# EAGLE board PIC18F14K50 USB (EAGLE 6.4)
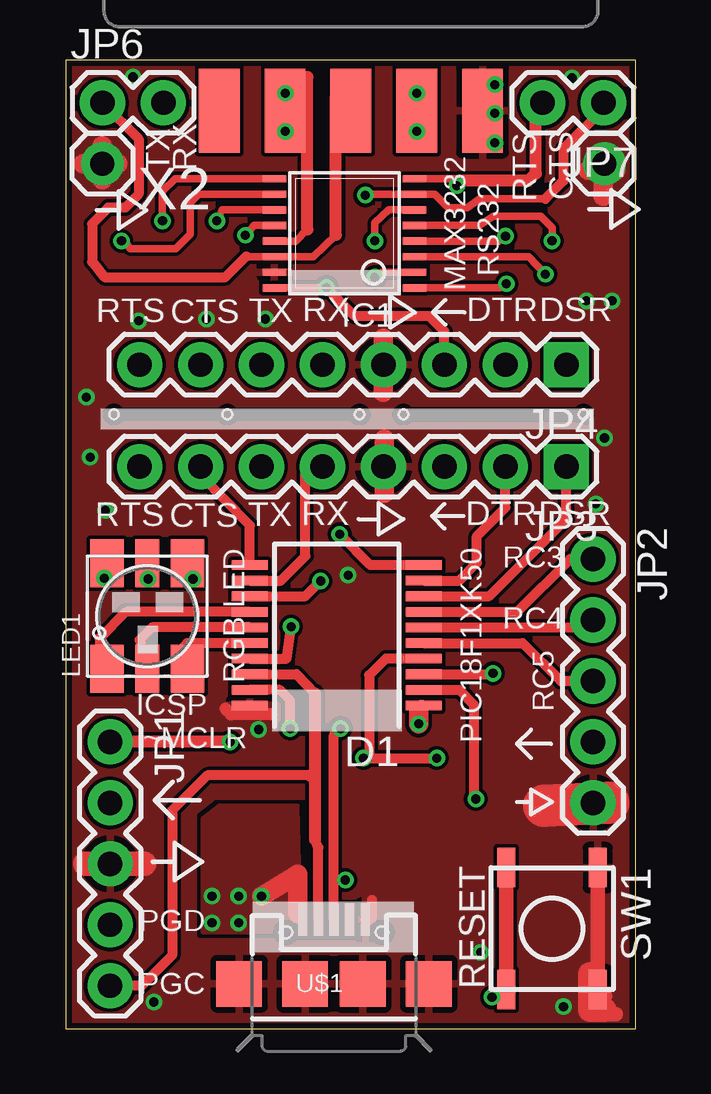
[diagram p0: board, top side]
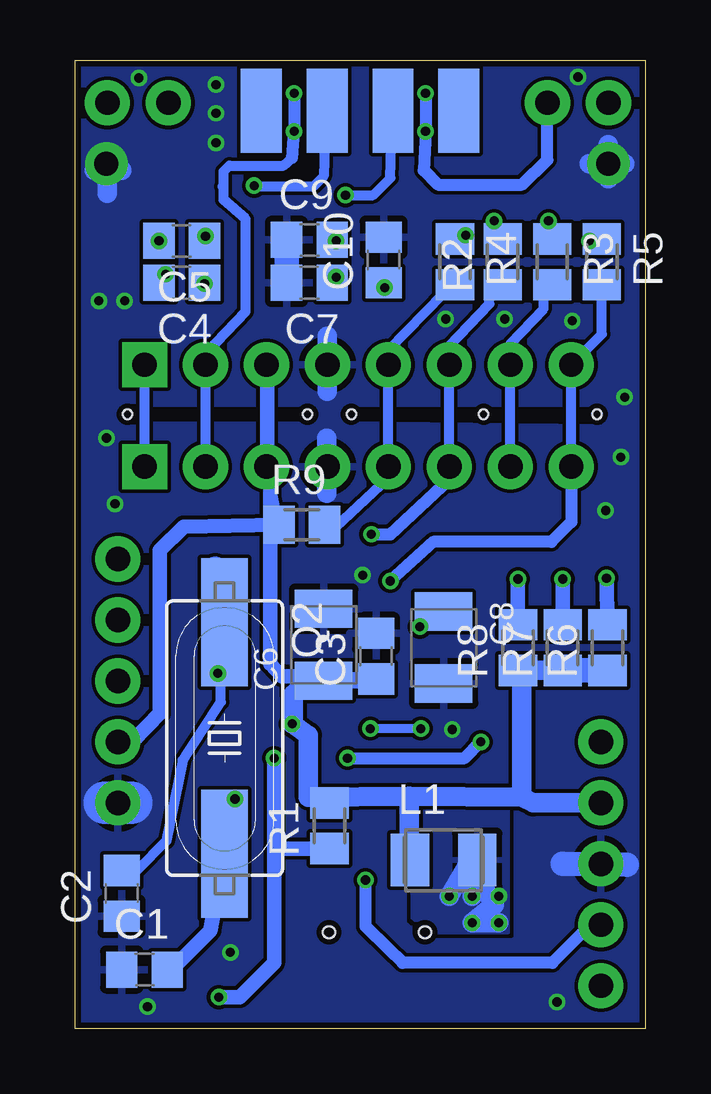
[diagram p1: board, bottom side, seen from below]

Size 23.75 x 40.36 mm. Coordinates in mm from the lower left corner, seen from the top.
Outline: 23.75,0 23.75,40.36 0,40.36 0,0 23.75,0
Copper layers (1*16): Top 0.035mm / dielectric 1.5mm / Bottom 0.035mm
Design rules "Fusion_eagle_rule_v1.1": minimum track width 6mil, minimum drill 12mil, track to track 6mil, track to pad 6mil, pad to pad 6mil, via to via 6mil, smd to smd 0mil, copper to edge 10mil, drill to drill 10mil, minimum pad ring 10mil, minimum via ring 6mil, stop-mask expansion 2mil, vias tented up to drill 100mil, thermal gap 10mil
Holes 0.38 mm at 21.57,25.6 2,25.6 14.07,25.6 12.24,25.6 6.72,25.6

## Footprints (pad centres in the part's own frame; a part is rotated, then mirrored left to right if it is on the bottom)
C0805 = smd 1.3 x 1.5: 1 -0.95,0; 2 0.95,0
SMC_B = smd 1.6 x 2.4: + -1.5,0; - 1.5,0
SSOP20 = smd 0.4 x 1.5: 1 -2.925,-3.625; 2 -2.275,-3.625; 3 -1.625,-3.625; 4 -0.975,-3.625; 5 -0.325,-3.625; 6 0.325,-3.625; 7 0.975,-3.625; 8 1.625,-3.625; 9 2.275,-3.625; 10 2.925,-3.625; 11 2.925,3.625; 12 2.275,3.625; 13 1.625,3.625; 14 0.975,3.625; 15 0.325,3.625; 16 -0.325,3.625; 17 -0.975,3.625; 18 -1.625,3.625; 19 -2.275,3.625; 20 -2.925,3.625
TSSOP16 = smd 0.305 x 0.991: 1 -2.275,-2.918; 2 -1.625,-2.918; 3 -0.975,-2.918; 4 -0.325,-2.918; 5 0.325,-2.918; 6 0.975,-2.918; 7 1.625,-2.918; 8 2.275,-2.918; 9 2.275,2.918; 10 1.625,2.918; 11 0.975,2.918; 12 0.325,2.918; 13 -0.325,2.918; 14 -0.975,2.918; 15 -1.625,2.918; 16 -2.275,2.918
1X05 = drill 1.016 pad 1.88: 1 0,0; 2 2.54,0; 3 5.08,0; 4 7.62,0; 5 10.16,0
1X08 = drill 1.016 pad 1.88 square: 1 0,0 | drill 1.016 pad 1.88: 2 2.54,0; 3 5.08,0; 4 7.62,0; 5 10.16,0; 6 12.7,0; 7 15.24,0; 8 17.78,0
1X02 = drill 1.016 pad 1.88: 1 0,0; 2 2.54,0
L3225M = smd 1.6 x 2.2: 1 -1.4,0; 2 1.4,0
LED-TRICOLOR-5050 = smd 2 x 1.4: 1 -2.2,1.681; 3 -2.2,-1.681; 4 2.2,-1.681; 6 2.2,1.681 | smd 2 x 1: 2 -2.2,0; 5 2.2,0
HC49UP = smd 5.334 x 1.93: 1 -4.826,0; 2 4.826,0
M0805 = smd 1.3 x 1.6: 1 -0.95,0; 2 0.95,0
TACT_SWITCH_SMALL = smd 1.651 x 0.762: 1 -2.54,1.905; 2 2.54,1.905; 3 -2.54,-1.905; 4 2.54,-1.905
USB-MICROB-HW-MC-5F-01 = smd 0.4 x 1.35: D+ 0,2.675; D- -0.65,2.675; ID 0.65,2.675 | smd 0.38 x 1.35: GND 1.3,2.675; VBUS -1.3,2.675 | smd 1.9 x 1.9: MT1 -3.95,0; MT2 3.95,0; MT3 1.2,0; MT4 -1.2,0 | hole 0.5: -2,2.15; 2,2.15
F09D = smd 1.7 x 3.5: 1 -5.486,-6.045; 2 -2.743,-6.045; 3 0,-6.045; 4 2.743,-6.045; 5 5.486,-6.045 | smd 1.7 x 3.5 bottom: 6 -4.115,-6.045; 7 -1.372,-6.045; 8 1.372,-6.045; 9 4.115,-6.045

## Placement (x,y rotation side)
C1  [C0805]  20.85,2.46 0 bottom
C2  [C0805]  21.81,5.64 90 bottom
C3  [C0805]  11.21,15.52 90 bottom
C4  [C0805]  19.3,31.08 180 bottom
C5  [C0805]  19.3,32.82 180 bottom
C6  [SMC_B]  13.39,15.99 90 bottom
C7  [C0805]  13.99,31.08 180 bottom
C8  [SMC_B]  8.39,15.88 270 bottom
C9  [C0805]  13.99,32.86 0 bottom
C10  [C0805]  10.89,32.03 90 bottom
D1  PIC18F14K50D  [SSOP20]  11.29,16.39 90 top
IC1  MAX3232EUE  [TSSOP16]  11.61,33.14 90 top
JP1  [1X05]  1.84,11.95 270 top
JP2  [1X05]  21.96,19.57 270 top
JP3  [1X08]  20.85,23.42 180 top
JP4  [1X08]  20.85,27.66 180 top
JP6  [1X02]  1.52,38.58 0 top
JP7  [1X02]  22.4,38.58 180 top
L1  [L3225M]  8.39,7.02 0 bottom
LED1  LED-TRICOLOR-5050  [LED-TRICOLOR-5050]  3.39,17.18 90 top
Q2  [HC49UP]  17.52,12.1 270 bottom
R1  [M0805]  13.15,8.45 90 bottom
R2  [M0805]  5.93,31.95 90 bottom
R3  [M0805]  3.87,31.95 270 bottom
R4  [M0805]  7.91,31.95 270 bottom
R5  [M0805]  1.8,31.95 270 bottom
R6  [M0805]  1.56,15.88 90 bottom
R7  [M0805]  3.43,15.88 90 bottom
R8  [M0805]  5.3,15.88 90 bottom
R9  [M0805]  14.3,20.99 0 bottom
SW1  [TACT_SWITCH_SMALL]  20.26,4.17 270 top
U$1  USB-MICROB-HW-MC-5F  [USB-MICROB-HW-MC-5F-01]  11.17,1.87 0 top
X2  [F09D]  11.88,44.29 0 top

## Library data of the parts
C1-C5 C7 C9 C10 L1 R1-R9 = rcl
C6 C8 SW1 = dp_devices
D1 = pic18f14k50
IC1 = maxim; MF: MAXIM; MPN: MAX3232EUE+; OC_FARNELL: 1379769; OC_NEWARK: 68K4632
JP1-JP4 JP6 JP7 LED1 U$1 = SparkFun
Q2 = crystal; OC_FARNELL: unknown; OC_NEWARK: unknown
X2 = con-subd; OC_FARNELL: unknown; OC_NEWARK: unknown

## Nets
5V: C3.1 C6.+ C10.1 D1.1 IC1.16 JP1.2 JP2.4 JP3.3 JP4.3 L1.1 R1.2 R6.1 R7.1 R8.1 R9.1
CTS: IC1.9 R3.1
CTS9: IC1.8 JP7.2 X2.8
CTS_M: D1.11 JP3.7 JP4.7 R3.2
D+: D1.19 JP1.4 U$1.D+
D-: D1.18 JP1.5 U$1.D-
DSR: D1.8 JP3.1 JP4.1
DTR: D1.9 JP3.2 JP4.2 X2.4
GND: C1.1 C2.1 C3.2 C6.- C7.2 C8.- C9.1 C10.2 D1.20 IC1.15 JP1.3 JP2.5 JP3.4 JP4.4 SW1.1 SW1.2 U$1.GND U$1.MT1 U$1.MT2 U$1.MT3 U$1.MT4 X2.5
LED1: D1.16 LED1.3
LED2: D1.15 LED1.2
LED3: D1.14 LED1.1
N$1: C2.2 D1.3 Q2.1
N$2: C1.2 D1.2 Q2.2
N$3: D1.5 JP2.3
N$4: D1.6 JP2.2
N$5: D1.7 JP2.1
N$13: LED1.6 R6.2
N$18: LED1.5 R7.2
N$19: LED1.4 R8.2
N$20: C4.1 IC1.1
N$21: C4.2 IC1.3
N$22: C5.1 IC1.4
N$23: C5.2 IC1.5
N$24: C7.1 IC1.2
N$25: C9.2 IC1.6
N$55: C8.+ D1.17
RTS: IC1.10 R5.1
RTS9: IC1.7 JP7.1 X2.7
RTS_M: D1.13 JP3.8 JP4.8 R5.2
RX: IC1.12 R4.1
RX9: IC1.13 JP6.2 X2.2
RX_M: D1.12 JP3.5 JP4.5 R4.2 R9.2
TX: IC1.11 R2.2
TX9: IC1.14 JP6.1 X2.3
TX_M: D1.10 JP3.6 JP4.6 R2.1
VBUS5V: L1.2 U$1.VBUS
~MCLR: D1.4 JP1.1 R1.1 SW1.3 SW1.4

## Tracks (layer width: path | path; a pad name or v marks a point on that pad's centre or on a via)
5V  (via drill 0.38)
  Top 0.305: IC1.16 8.84,30.86 v10.85,30.88
  Top 0.406: 14.71,13.46 D1.1 14.7,13.25 | JP4.3 15.77,29.05 15.14,29.69 12.04,29.69 v10.85,30.88
  Top 0.813: v14.7,12.7 14.7,13.25
  Bottom 0.305: v10.85,30.88 10.49,30.88
  Bottom 0.406: JP3.3 15.73,23.45 15.73,23.38 15.61,23.38 | R9.1 15.65,22.94 15.61,22.9 | 15.73,27.62 JP4.3
  Bottom 0.5: C10.1 10.97,31 v10.85,30.88 | R1.2 14.03,9.64
  Bottom 0.61: 15.61,23.54 15.61,23.38 15.61,22.9 15.61,15.2 15.14,14.68 14.66,14.68 14.28,14.31 | R9.1 19.23,20.91 20.22,19.92 20.22,13.14 21.33,11.99 22.2,11.99 JP2.4 | 15.73,23.45 15.73,27.62
  Bottom 0.7: C6.+ 12.87,14.53 11.61,14.53 C3.1
  Bottom 0.813: JP1.2 4.66,9.41 5.14,9.64 | 5.14,9.64 9.82,9.68 | 9.82,9.68 9.82,8.27 L1.1 | 9.82,9.68 14.03,9.64 14.03,12.22 v14.7,12.7 14.66,12.74 14.66,13.93 14.28,14.31 14.18,14.41 C6.+ | R7.1 R8.1 5.02,14.92 5.14,14.8 5.14,9.64
  Bottom 1.016: R6.1 R7.1
CTS  (via drill 0.38)
  Top 0.305: IC1.9 4.55,35.41 4.02,34.88 v4.02,33.66
  Bottom 0.5: v4.02,33.66 3.59,32.94 R3.1
CTS9  (via drill 0.38)
  Top 0.305: IC1.8 16.35,35.41 v16.29,35.12
  Top 0.5: v16.29,35.12 16.37,35.32 19.26,35.32 19.58,35.64 19.58,37.98 JP7.2
  Bottom 0.305: 13.31,38.18 X2.8 | 16.21,35.16 v16.29,35.12
  Bottom 0.406: 13.31,38.18 13.39,35.52 13.83,35.08 16.21,35.08 v16.29,35.12
CTS_M
  Top 0.406: D1.11 7.66,20.97 5.61,23.06 JP3.7
  Bottom 0.406: JP3.7 JP4.7 5.61,28.54 4.22,30 4.22,30.64 R3.2
D+  (via drill 0.38)
  Top 0.406: v9.34,12.5 9.34,13.69 8.92,14.12 D1.19 | 11.17,6.27 11.17,12.22 v11.45,12.5 | U$1.D+ 11.17,6.27 | 11.17,6.27 v11.64,6.19
  Bottom 0.381: v9.34,12.5 v11.45,12.5
  Bottom 0.5: JP1.4 2.28,4.33 3.87,2.74 10.1,2.74 10.69,3.33 11.64,4.25 v11.64,6.19
D-
  Top 0.406: D1.18 9.62,14.77 10.37,13.97 | U$1.D- 10.52,7.55 10.37,7.89 | 10.18,10.56 5.89,10.56 4.42,9.09 4.42,3.06 3.15,1.79 JP1.5
  Top 0.5: 10.37,13.97 10.37,10.36 | 10.37,10.36 10.37,7.89 | 10.18,10.56 10.37,10.36
DSR
  Top 0.406: D1.8 17.64,18.02 20.85,21.23 JP3.1
  Bottom 0.406: JP3.1 JP4.1
DTR  (via drill 0.38)
  Top 0.406: D1.9 16.38,18.67 17.12,19.41 17.12,20.52 18.31,21.71 JP3.2 | v14.62,37.39 14.66,38.17 X2.4
  Bottom 0.406: 17.56,35.12 17.56,34.53 16.65,33.73 16.65,29.89 18.31,28.14 JP4.2 JP3.2 | 17.56,35.12 17.56,35.72 17.32,35.96 15.06,35.96 14.7,36.27 | 17.6,35.08 17.56,35.12
  Bottom 0.5: 14.7,36.27 v14.62,37.39 v14.62,38.97
GND  (via drill 0.38, 1 pad 1.78)
  Top 0.254: 8.11,13.1 D1.20
  Top 0.406: 12.76,5.36 12.76,4.64 12.52,4.41 U$1.GND
  Top 0.5: 8.59,13.1 8.11,13.1 6.88,13.1 6.64,13.34
  Top 0.61: SW1.1 SW1.2 22.48,1.35 21.84,0.79 | 22.44,0.59 22.92,0.59 | 22.44,0.79 22.44,0.59 | 22.44,0.59 22.04,0.59
  Top 0.813: 13.27,22.3 13.27,24.57 | 2.16,36.04 0.73,36.04 | 22.92,35.76 21.77,35.76 | 1.52,36.79 1.52,35.36 | 22.4,36.47 22.4,34.69 | 13.23,26.51 13.23,28.77
  Top 1.016: 3.27,6.87 0.81,6.87 | 21.84,2.26 21.84,0.79 22.44,0.79
  Top 1.778: 19.94,9.29 22.6,9.41
  Bottom 0.813: 13.27,22.3 13.27,24.61 | 2.32,36.04 0.85,36.04 | 22.96,35.76 21.8,35.76 | 1.52,35.4 1.52,36.83 | 22.4,36.43 22.4,34.81 | 13.23,26.55 13.23,28.85
  Bottom 1.016: 3.43,6.87 0.77,6.83 | C9.1 C7.2
  Bottom 1.778: 21.41,9.41 22.52,9.41
  other vias: 17.88,36.91 17.88,38.14 17.88,39.33 21.09,39.61 2.8,39.65 1.64,21.59 8.03,12.46 11.76,18.89 17.28,3.17 20.73,0.91 3.67,1.11 22.44,24.61 22.76,30.32 22.08,21.87 1.01,23.81 0.85,26.31 21.69,30.32 1.52,36.04 22.44,36.04 3.03,29.49 5.85,29.57 8.31,29.57
  pour Top (rank 3): -1.29,-0.87 -1.33,42.58 24.78,42.35 24.7,-0.52
  pour Bottom (rank 3): -0.22,-0.2 -0.62,42.19 23.99,42.03 25.02,-0.56 -0.82,-0.75
LED1
  Top 0.406: D1.16 5.05,16.07 4.78,15.8 4.78,15.05 LED1.3
LED2
  Top 0.406: D1.15 3.6,16.72 3.07,16.19 LED1.2
LED3
  Top 0.406: D1.14 2.5,17.37 1.41,16.27 1.41,15.04 LED1.1
N$1  (via drill 0.38)
  Top 0.406: D1.3 17.76,14.77 v17.8,14.8
  Bottom 0.406: C2.2 21.17,6.59 19.94,7.82 19.26,11.19 17.68,13.61 17.68,14.68 v17.8,14.8 | v17.8,14.8 17.99,14.8 | v17.8,14.8 17.8,16.45 Q2.1
  Bottom 1.016: 17.92,19.15 Q2.1
N$2  (via drill 0.38)
  Top 0.406: D1.2 16.38,14.12 17,13.49 17,9.72 v17.08,9.56
  Bottom 0.406: Q2.2 18.11,8.95 17.69,9.37 17.32,9.37 17.08,9.41 v17.08,9.56
  Bottom 0.61: C1.2 19.74,2.46 18.11,4.09 Q2.2
N$3
  Top 0.406: D1.5 19.03,16.07 20.61,14.49 JP2.3
N$4
  Top 0.406: D1.6 21.93,16.72 JP2.2
N$5
  Top 0.406: D1.7 18.81,17.37 21.01,19.57 JP2.1
N$6
  cutout Top: 13.79,25.88 13.79,25.32 21.77,25.32 21.77,25.88
  cutout Top: 1.76,25.32 1.76,25.88 12.52,25.88 12.52,25.32
  cutout Bottom: 13.79,25.32 13.79,25.88 21.77,25.88 21.77,25.32
  cutout Bottom: 1.8,25.2 1.8,25.88 12.52,25.88 12.52,25.32
N$13  (via drill 0.38 pad 0.61)
  Top 0.61: v1.6,18.77 1.64,19.33 LED1.6
  Bottom 0.61: R6.2 v1.6,18.77
N$18  (via drill 0.38 pad 0.61)
  Top 0.61: v3.43,18.73 LED1.5
  Bottom 0.61: R7.2 v3.43,18.73
N$19  (via drill 0.38 pad 0.61)
  Top 0.61: v5.29,18.73 5.37,19.97 LED1.4
  Bottom 0.61: R8.2 v5.29,18.73
N$20  (via drill 0.38)
  Top 0.305: IC1.1 18.1,30.86 v18.35,31.04
  Bottom 0.305: v18.35,31.04 18.39,31.11 C4.1
N$21  (via drill 0.38)
  Top 0.305: IC1.3 19.28,32.16 v19.98,31.43
  Bottom 0.305: 20.06,31.07 v19.98,31.43 20.25,31.16 C4.2
N$22  (via drill 0.38)
  Top 0.305: IC1.4 18.03,32.81 v18.31,33.02
  Bottom 0.305: v18.31,33.02 18.39,33.22 18.31,33.26 C5.1 v18.31,33.02
  Bottom 0.813: C5.1
N$23  (via drill 0.38)
  Top 0.305: IC1.5 17.25,33.46 17.8,33.85 19.78,33.85 20.26,33.38 C5.2
  Bottom 0.305: C5.2 20.21,32.63 20.26,32.31 C5.2
  other vias: 20.25,32.82
N$24  (via drill 0.38)
  Top 0.305: IC1.2 13.15,31.51 v12.87,31.31
  Bottom 0.305: v12.87,31.31 13.11,31 13.03,31.16 13.15,31.11 v12.87,31.31 | C7.1 13.23,31.23 v12.87,31.31
N$25  (via drill 0.38)
  Top 0.305: IC1.6 13.45,34.11 12.88,33.58 12.88,32.98 v12.87,32.82
  Bottom 0.305: 13.03,32.82 v12.87,32.82 C9.2
N$55  (via drill 0.38)
  Top 0.406: D1.17 9.2,15.42 v9.38,16.75
  Bottom 0.61: v9.38,16.75 9.18,17.11 9.14,17.18 7.92,17.18 C8.+
RTS  (via drill 0.38)
  Top 0.305: IC1.10 5.53,34.76 5.18,34.41 5.18,33.1 4.58,32.5 2.68,32.5 2.4,32.9 2.36,32.82 v2.32,32.82
  Bottom 0.305: 1.64,33.26 2.24,32.86 R5.1 2,33.1 1.96,33.14 2.08,33.18 v2.32,32.82
RTS9  (via drill 0.38)
  Top 0.305: IC1.7 13.99,34.76 | 13.99,34.76 12.79,34.76 v12.48,34.73 | 13.99,34.76 13.99,34.77 15.38,34.77 15.93,34.21 16.72,34.21 17.24,34.57 19.98,34.57
  Top 0.406: JP7.1 22.4,38.3 20.73,36.67 20.73,35.32 19.98,34.57
  Bottom 0.305: 10.57,38.19 X2.7 | 12.52,34.77 v12.48,34.73
  Bottom 0.406: v12.48,34.73 11.33,34.73 10.61,35.44 10.53,38.19 X2.7
RTS_M  (via drill 0.38)
  Top 0.406: D1.13 9.98,18.02 v10.61,18.65
  Bottom 0.406: v10.61,18.65 10.49,18.57 | JP3.8 JP4.8 1.8,28.93 R5.2
  Bottom 0.5: JP3.8 3.07,21.11 3.91,20.28 8.83,20.28 v10.61,18.65
RX  (via drill 0.38)
  Top 0.305: IC1.12 7.84,33.46 v7.48,33.06
  Bottom 0.305: v7.48,33.06 7.32,32.9 7.28,32.94 7.67,32.94 v7.48,33.06 | R4.1 7.44,32.9 v7.48,33.06
RX9  (via drill 0.38)
  Top 0.305: IC1.13 9.57,32.81 10.06,33.3 | X2.2 v9.14,37.39
  Top 0.5: 10.06,33.3 10.06,39.65 9.78,39.65 9.78,38.84 X2.2
  Bottom 0.5: JP6.2 4.06,36.2 5.14,35.16 8.63,35.16 9.22,35.76 v9.14,37.39 v9.14,38.97
RX_M
  Top 0.406: D1.12 8.96,18.67 9.98,19.68 9.98,23.14 JP3.5
  Bottom 0.406: R9.2 12.88,20.91 10.69,22.94 JP3.5 JP4.5 10.69,28.26 8.39,30.64 8.27,30.64 R4.2
TX  (via drill 0.38)
  Top 0.305: IC1.11 6.51,34.11 v6.29,33.66
  Bottom 0.305: v6.29,33.66 5.81,33.02 R2.2
TX9
  Top 0.305: 11.25,33.06 10.31,32.16 IC1.14 7.53,32.16
  Top 0.406: JP6.1 3.03,37.07 3.03,34.77 2.48,34.21 1.76,34.21 1.09,33.54 1.09,31.95 1.6,31.31 6.64,31.31 7.49,32.16 7.53,32.16
  Top 0.5: 11.25,33.06 11.25,38.84 | 11.25,39.73 11.25,38.84 | 11.25,38.84 X2.3
TX_M  (via drill 0.38)
  Top 0.406: D1.10 12.69,19.32 v11.41,20.6
  Bottom 0.406: 8.15,24.05 JP4.6 8.15,28.46 6.49,30.2 6.49,30.96 5.97,30.96 R2.1
  Bottom 0.5: v11.41,20.6 10.61,20.6 8.15,22.9 JP3.6 8.15,24.05
VBUS5V  (via drill 0.38)
  Top 0.406: 9.66,4.79 U$1.VBUS
  Top 0.813: v8.15,5.52 9.66,6.43 9.66,4.79
  Bottom 0.813: L1.2 7.12,7.14 v7.2,5.52 | 6.64,5.75 6.29,5.16 v7.2,4.41 v6.09,4.41 | 6.96,7.58 v8.15,5.52
  other vias: 6.09,5.52
  pour Top: 9.7,6.07 9.62,9.25 6.41,9.25 5.73,8.73 5.73,4.05 9.74,4.05
  pour Bottom: 5.73,4.05 5.73,9.56 9.66,9.6 9.66,4.64 9.03,4.05
~MCLR  (via drill 0.38, 0.38 pad 0.61)
  Top 0.406: D1.4 13.33,15.42 12.64,14.72 12.64,11.39 v12.4,11.27 v15.45,11.27 | SW1.4 18.47,1.71 18.35,1.19 v17.76,1.31
  Top 0.5: v6.84,11.95 JP1.1
  Top 0.61: SW1.4 SW1.3
  Bottom 0.5: v12.4,11.27 7.52,11.27 v6.84,11.95
  Bottom 0.61: v15.45,11.27 15.45,7.5 | 15.45,7.5 15.45,2.74 16.88,1.31 v17.76,1.31 | R1.1 15.45,7.5

## Text on the board
tSilk: TX | RTS | RX | CTS | MAX3232 | RS232 | RTS | CTS | TX | RX | DTR | DSR | RTS | CTS | TX | RX | DTR | DSR | RC3 | RC4 | RC5 | ICSP | RGB LED | ~MCLR | PIC18F1XK50 | RESET | PGD | PGC
bSilk: TX | CTS | R5 | RX | C9 | R3 | R2 | R4 | C10 | C7 | RTS | C5 | C4 | RTS | CTS | TX | RX | DTR | DSR | C8 | R9 | C3 | C0G | C2B | C1R | ICSP | C6 | ~MCLR | R6 | R7 | R8 | L1 | R1 | C2 | PGD | PGC | Designed by: / Gaurav Singh | www.circuitvalley.com | C1